# Altium PCB irf540触发V2.0.PcbDoc
Units mil, origin at the board's own origin, x right, y up, seen from the top; angles counter-clockwise.
Board outline 2532.19 x 1921.12 mil, 2 copper layers (Top Layer, Bottom Layer); 28 components, 16 nets, 70 pads, 0 vias.
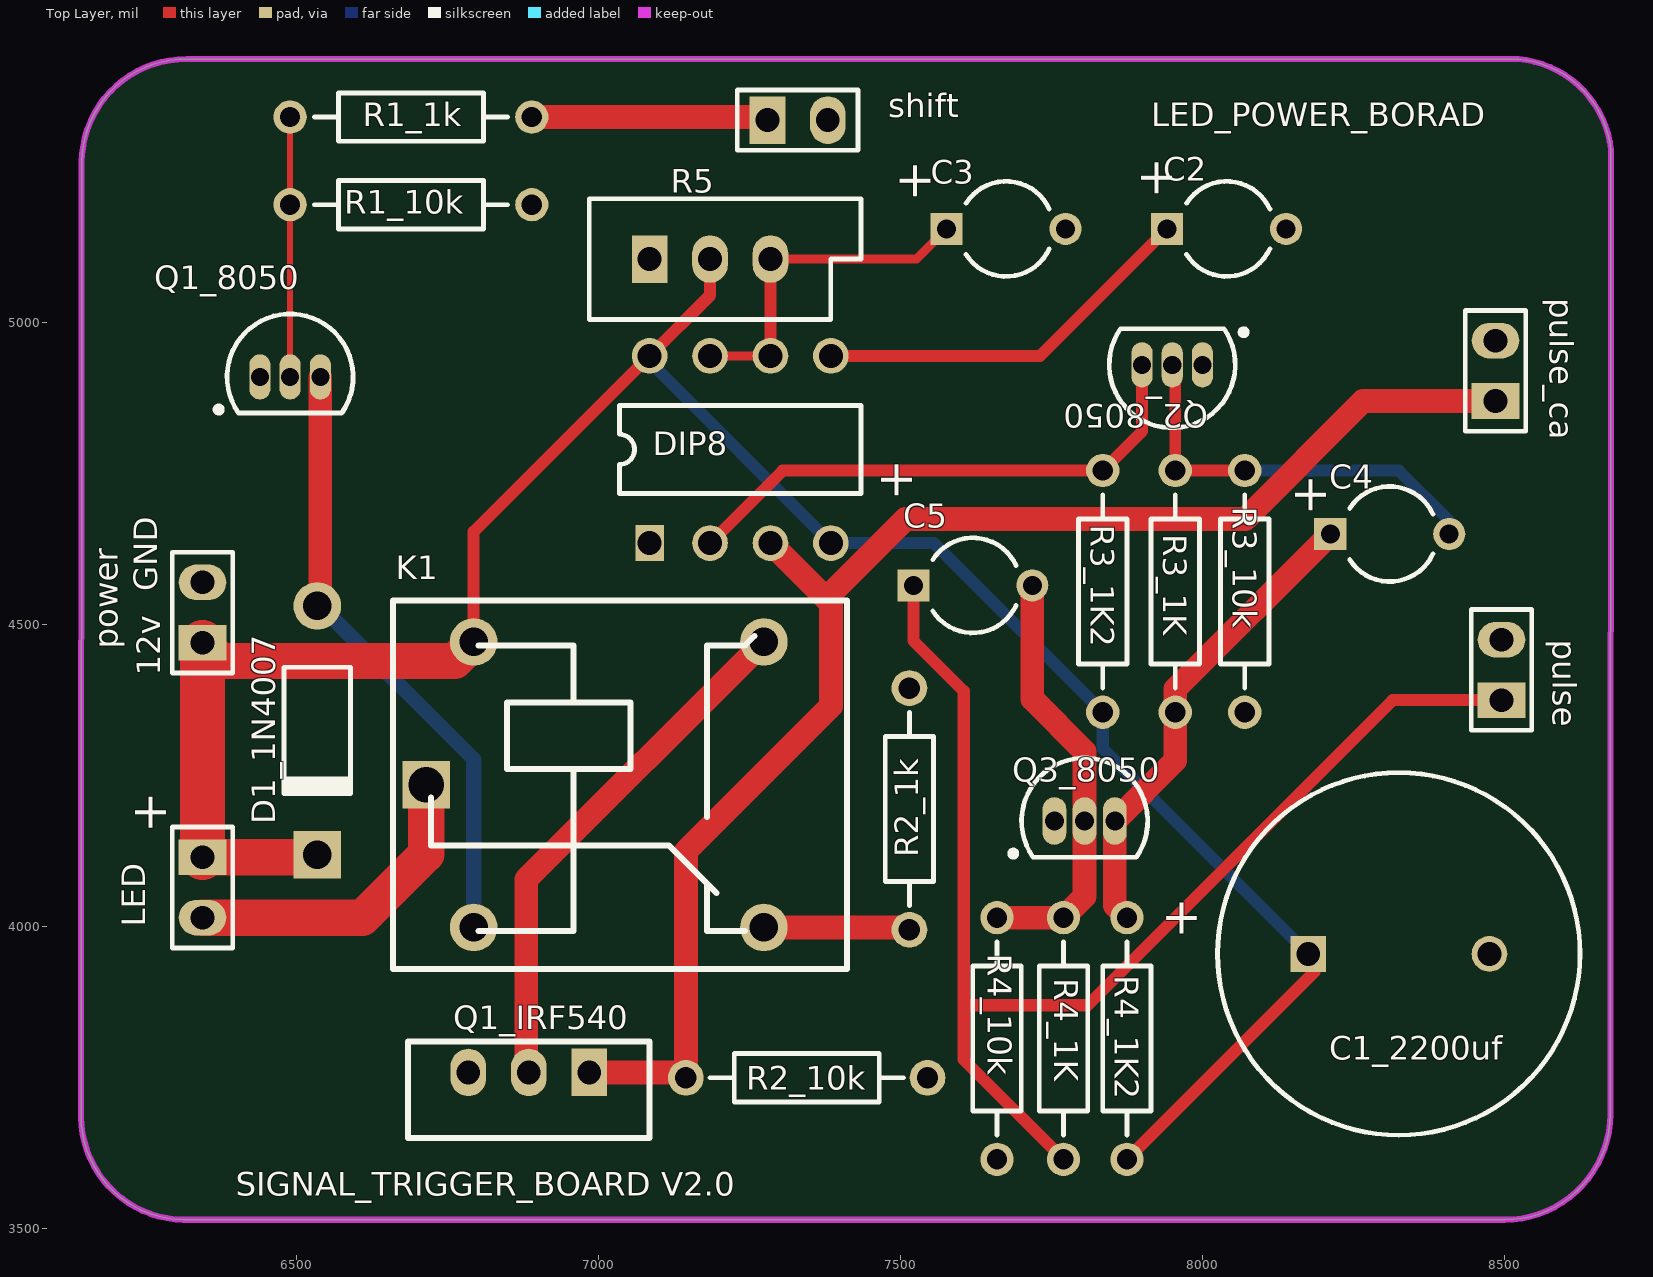
[diagram p0: Top Layer view]
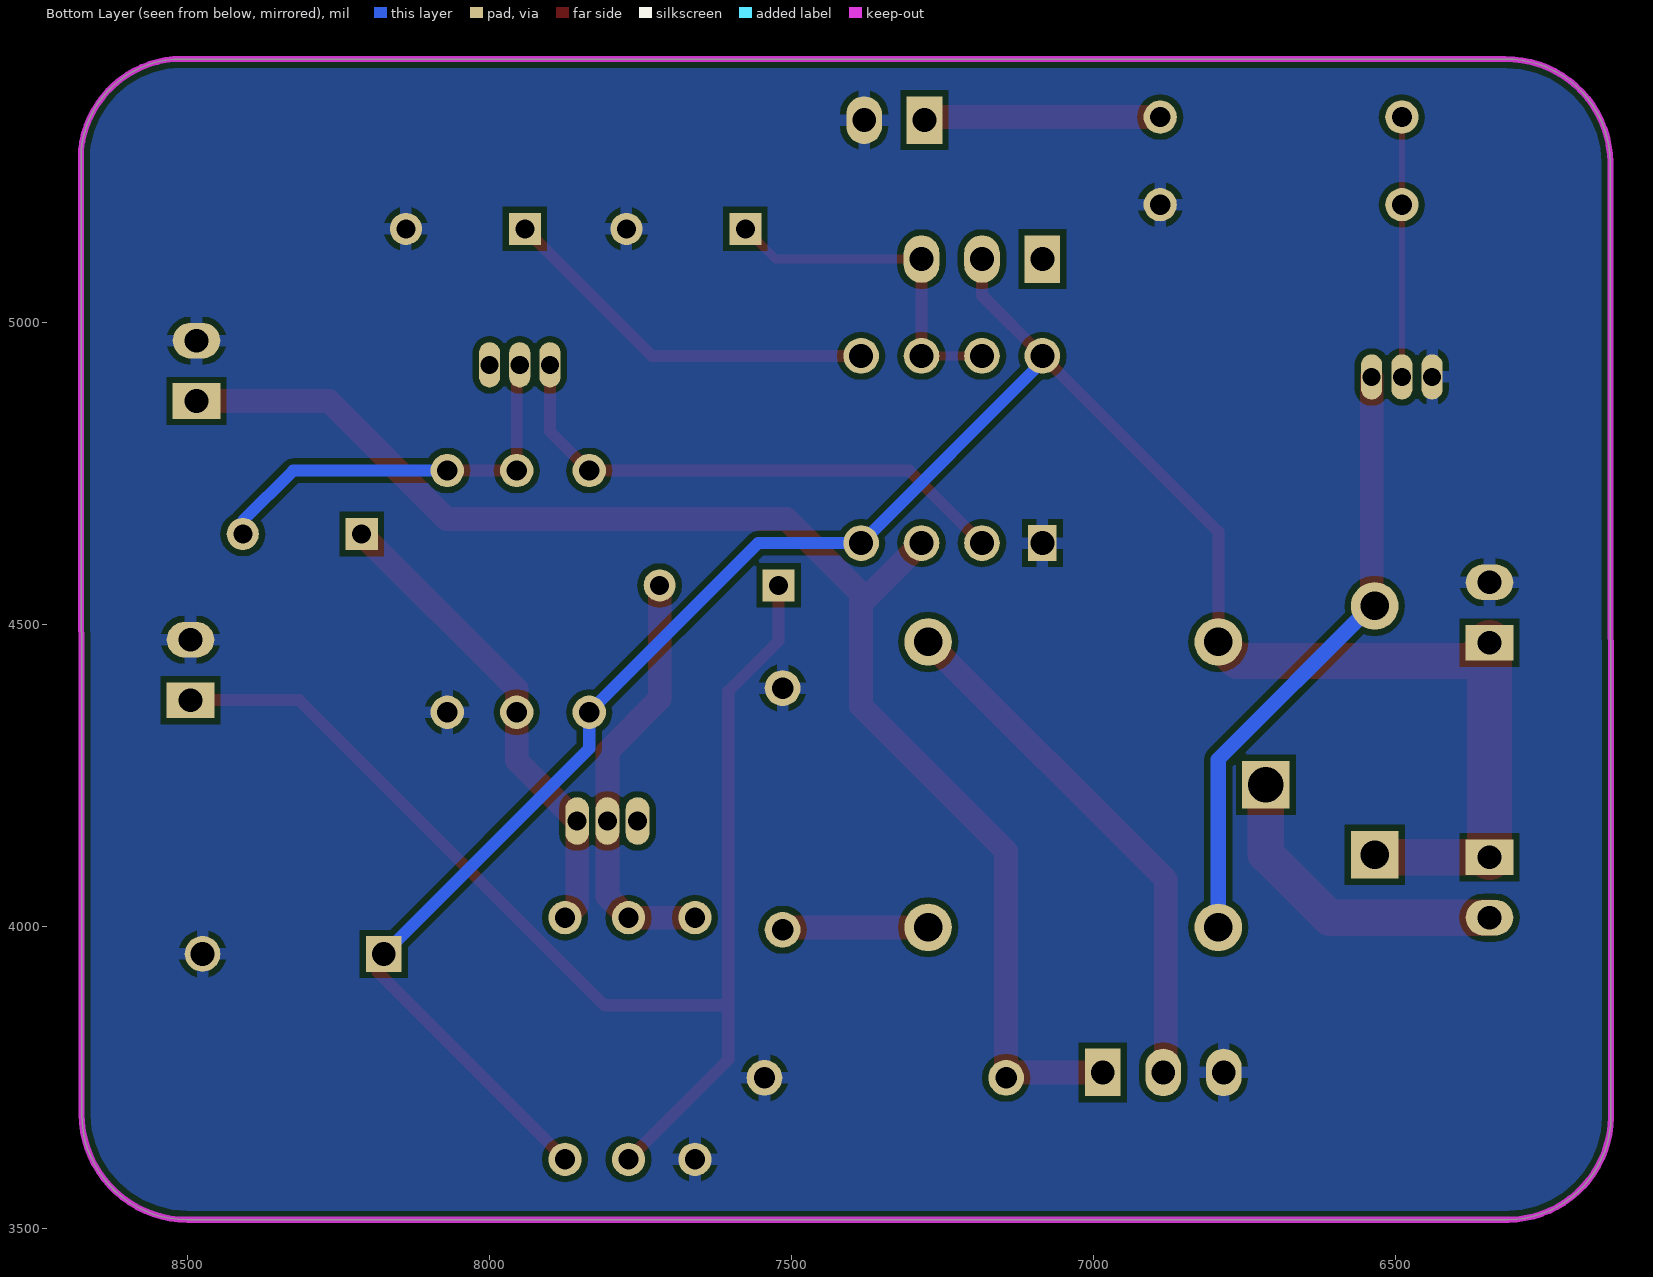
[diagram p1: Bottom Layer view, seen from below]

## Layer stack, top to bottom
Top Layer: signal copper 1.4
Dielectric: dielectric 12.6, FR-4, Dk 4.8
Bottom Layer: signal copper 1.4

## Board outline
6143.95,3685 ccw(c6316.21,3687.26) 6313.95,3515 8500,3515 ccw(c8500,3690) 8675,3690 8676.14,5286.26 ccw(c8508.41,5268.04) 8522.94,5436.12 6319.07,5436.12 ccw(c6317.64,5263.56) 6145.07,5265

## Design rules (kind name [scope] priority, off if disabled: settings)
Clearance [All] p1: gap=10
PlaneConnect [All] p1: planeconnectstyle=Relief reliefexpansion=20 reliefentries=4 reliefconductorwidth=20 reliefairgap=10
PolygonConnect [All] p1: connectstyle=Relief reliefconductorwidth=20 reliefentries=4 polygonreliefangle="90 Angle" airgapwidth=10
RoutingVias [All] p1: holewidth=28 width=50 viastyle="Through Hole" minholewidth=28 minwidth=50 maxholewidth=28 maxwidth=50
SolderMaskExpansion [All] p1: expansion=4
Width [All] p1: maxlimit=78.74 minlimit=10 preferedwidth=10
27 further rules are at their usual default settings.

## Components (designator, comment, footprint, x,y, rotation, side; value= is the part's Value field where it differs from the comment)
C1_2200uf "Cap" RB7.6-15 8325,3955 r180 top
C2 "Cap2" CAPR5-4X5 8040,5155 r0 top
C3 "Cap2" CAPR5-4X5 7675,5155 r0 top
C4 "Cap2" CAPR5-4X5 8310,4650 r0 top
C5 "Cap2" CAPR5-4X5 7620,4565 r0 top
D1_1N4007 "Diode 1N4007" DO-41 6535,4325 r270 top
DIP8 "NE555" DIP8 7085,4635 r90 top
K1 "Relay-SPDT" RELAY_SDR 6660,3930 r0 top
LED "Header 2" HDR1X2 6345,4115 r270 top
power "Header 2" HDR1X2 6345,4470 r90 top
pulse "Header 2" HDR1X2 8495,4375 r90 top (schematic designator PULSE)
pulse_ca "Header 2" HDR1X2 8485,4870 r90 top
Q1_8050 "NPN" TO-226-AA#1 6490,4910 r270 top
Q1_IRF540 "MOSFET-N" PCBComponent_1 7085,3810 r180 top
Q2_8050 "NPN" TO-226-AA#1 7950,4930 r90 top
Q3_8050 "NPN" TO-226-AA#2 7805,4175 r270 top
R1_1k "Res2" AXIAL-0.4#1 6690,5340 r180 top
R1_10k "Res2" AXIAL-0.4#1 6690,5195 r180 top
R2_1k "Res2" AXIAL-0.4#2 7515,4195 r90 top (schematic designator R2)
R2_10k "Res2" AXIAL-0.4#2 7345,3750 r180 top
R3_1K "Res2" AXIAL-0.4#1 7955,4555 r270 top
R3_1K2 "Res2" AXIAL-0.4#1 7835,4555 r90 top
R3_10k "Res2" AXIAL-0.4#1 8070,4555 r90 top
R4_1K "Res2" AXIAL-0.4#1 7770,3815 r270 top
R4_1K2 "Res2" AXIAL-0.4#1 7875,3815 r90 top
R4_10k "Res2" AXIAL-0.4#1 7660,3815 r90 top
R5 "Res Tap" VR5 7185,5105 r0 top
shift "Header 2" HDR1X2 7280,5335 r0 top

## Footprints (in the part's own frame and the unit in brackets; to place one, negate y for a bottom-side part, rotate by r counter-clockwise, add the part's x,y. Pads: shape width x height; smd on the part's side, far side on the other; paste and mask are expansions set on the pad)
AXIAL-0.4#1 [mm] "Axial Device, Thru-Hole; 2 Leads; 0.4 in Pin Spacing"
  round 1.4 hole 0.85: 1(-5.08,0) 2(5.08,0)
  silkscreen extent -4.06,-1.02 4.06,1.02
AXIAL-0.4#2 [mm] "Axial Device, Thru-Hole; 2 Leads; 0.4 in Pin Spacing"
  round 1.5 hole 0.9: 1(-5.08,0) 2(5.08,0)
  silkscreen extent -4.06,-1.02 4.06,1.02
CAPR5-4X5 [mm] "Capacitor; 2 Leads"
  rect 1.35x1.35 hole 0.8: 1(-2.5,0)
  round 1.35 hole 0.8: 2(2.5,0)
  silkscreen extent -1.69,-2 1.82,2
DIP8 [mm]
  rect 1.5x1.2 hole 1: 1(0,0)
  round 1.5 hole 1: 2(0,-2.54) 3(0,-5.08) 4(0,-7.62) 5(7.87,-7.62) 6(7.87,-5.08) 7(7.87,-2.54) 8(7.87,0)
  silkscreen extent 2.08,-8.89 5.79,1.27
DO-41 [mm] "Diode, Axial; Body 5.2 x 2.7 mm (LxDia. max), Lead Dia. 0.86 mm (max)"
  round 2 hole 1.2: 1(-5.23,0)
  rect 2x2 hole 1.2: 2(5.23,0)
  silkscreen extent -2.65,-1.4 2.75,1.4
HDR1X2 [mm] "Connector; Header; 2 Position"
  rect 1.5x2 hole 1: 1(0,0)
  oval 1.5x2 hole 1: 2(2.54,0)
  silkscreen extent -1.27,-1.27 3.81,1.27
PCBComponent_1 [mm]
  rect 1.5x2 hole 1: 1(2.54,1.3)
  oval 1.5x2 hole 1: 2(5.08,1.3) 3(7.62,1.3)
  silkscreen extent 0,0 10.16,4.06
RB7.6-15 [mm] "Polarized Capacitor (Radial); 2 Leads"
  rect 1.5x1.5 hole 1: 1(3.81,0)
  round 1.5 hole 1: 2(-3.81,0)
  silkscreen extent -7.62,-7.62 7.62,7.62
RELAY_SDR [mm]
  rect 2x2 hole 1.5: 1(1.4,7.75)
  round 2 hole 1.2: 2(15.6,1.75) 3(15.6,13.75) 4(3.4,13.75) 5(3.4,1.75)
  silkscreen extent 0,0 19.1,15.5
TO-226-AA#1 [mil] "TO, Flat Index; 3 In-Line, Axial Leads; Body Dia. 4.8mm; Leads 0.55 x 0.51 mm (max)"
  oval 75x35 hole 30: 1(0,-50) 2(0,0) 3(0,50)
  silkscreen extent -104,-123 60,104, body extent -105,-105 60,105, height 210
TO-226-AA#2 [mil] "TO, Flat Index; 3 In-Line, Axial Leads; Body Dia. 4.8mm; Leads 0.55 x 0.51 mm (max)"
  oval 78.74x39.37 hole 31.5: 1(0,-50) 2(0,0) 3(0,50)
  silkscreen extent -104,-123 60,104, body extent -105,-105 60,105, height 210
VR5 [mm] "Thru-Hole; 3 Leads"
  rect 1.5x2 hole 1: 1(-2.54,0)
  oval 1.5x2 hole 1: 2(0,0) 3(2.54,0)
  silkscreen extent -5.08,-2.54 6.35,2.54

## Part data
C1_2200uf: library part "Cap Pol1", "Polarized Capacitor (Radial)"
C2 C3 C4 C5: "Capacitor"
D1_1N4007: "1 Amp General Purpose Rectifier"
K1: "Single-Pole Dual-Throw Relay"
LED power pulse pulse_ca shift: "Header, 2-Pin"
Q1_8050 Q2_8050 Q3_8050: "NPN Bipolar Transistor"
Q1_IRF540: "N-Channel MOSFET"
R1_1k R1_10k R2_1k R2_10k R3_1K R3_1K2 R3_10k R4_1K R4_1K2 R4_10k: "Resistor"
R5: "Tapped Resistor"

## Nets (pads, with @x,y where several pads share a name; then routed paths per layer and width w, separated by ;. In a path a pad name is that pad's centre, name@x,y a point inside that pad or via, vN(x,y) a via of type N, cw(c..) or ccw(c..) an arc to the next point about the centre after c; other vN are vias at no path point)
12V: C1_2200uf.1 D1_1N4007.2 DIP8.4 DIP8.8 K1.4 LED.1 power.1 R3_1K2.1 R4_1K2.1 R5.2 | length 3830.3
  Top Layer w20: K1.4 6793.86,4653.7 DIP8.8 7185,5044.84 R5.2 ; R4_1K2.1 8185,3925 C1_2200uf.1@8185,3965
  Top Layer w60: LED.1 D1_1N4007.2@6530.91,4115 ; power.1 6375,4440 6762.52,4440 K1.4
  Top Layer w75: LED.1 power.1
  Bottom Layer w20: DIP8.8 7085,4935 DIP8.4 7555.28,4635 7835,4355.28 R3_1K2.1 7835,4295 C1_2200uf.1
GND: C1_2200uf.2 C2.2 C3.2 DIP8.1 power.2 pulse.2 pulse_ca.2 Q1_8050.1 Q1_IRF540.3 Q2_8050.1 Q3_8050.1 R1_10k.1 R2_1k.2 R2_10k.1 R3_10k.1 R4_10k.1 shift.2
INPUT_PUL: C5.1 pulse.1 R4_1K.2 | length 2152.1
  Top Layer w20: C5.1 7521.57,4473.43 7605,4390 7605,3870 ; R4_1K.2 7605,3780 7605,3870 ; pulse.1 8315,4375 7810,3870 7605,3870
MOS_PUL_CA: DIP8.3 pulse_ca.1 Q1_IRF540.1 R2_10k.2 | length 2437.8
  Top Layer w39.37: Q1_IRF540.1 7136.18,3758.82 R2_10k.2 7145,4125 7385,4365 7385,4551.26 7508.74,4675 8070.96,4675 8265.96,4870 pulse_ca.1 ; DIP8.3 7385,4535
NetC2_1: C2.1 DIP8.5 | length 643.6
  Top Layer w19.68: DIP8.5 7731.42,4944.84 C2.1
NetC3_1: C3.1 DIP8.6 DIP8.7 R5.3 | length 572.4
  Top Layer w15: DIP8.7 DIP8.6 ; R5.3 7526.57,5105 C3.1
  Top Layer w20: DIP8.6 R5.3
NetC4_1: C4.1 Q3_8050.3 R3_1K.2 R4_1K2.2 | length 791
  Top Layer w39.37: R4_1K2.2 7855,4035 Q3_8050.3 7955,4275 R3_1K.2 7955,4393.43 C4.1
NetC4_2: C4.2 Q2_8050.2 R3_1K.1 R3_10k.2 | length 686.6
  Top Layer w19.68: Q2_8050.2 7955,4925 R3_1K.1 R3_10k.2
  Bottom Layer w19.68: R3_10k.2 8325,4755 8408.43,4671.57 C4.2
NetC5_2: C5.2 Q3_8050.2 R4_1K.1 R4_10k.2 | length 710.4
  Top Layer w39.37: R4_10k.2 R4_1K.1 7805,4050 Q3_8050.2 7805,4290 7718.43,4376.57 C5.2
NetD1_1N4007_1: D1_1N4007.1 K1.5 Q1_8050.3 | length 1023.4
  Top Layer w39.37: D1_1N4007.1 6540,4535.91 Q1_8050.3
  Bottom Layer w25: D1_1N4007.1@6540.05,4530.91 6793.86,4277.1 K1.5
  Bottom Layer w39.37: D1_1N4007.1 D1_1N4007.1@6540.05,4530.91
NetDIP8_2: DIP8.2 Q2_8050.3 R3_1K2.2 | length 901.6
  Top Layer w19.68: DIP8.2 7305,4755 R3_1K2.2 7900,4820 Q2_8050.3
NetK1_1: K1.1 LED.2 | length 528.7
  Top Layer w60: LED.2 6610,4015 6715.12,4120.12 K1.1
NetK1_2: K1.2 R2_1k.1 | length 236.9
  Top Layer w39.37: K1.2 R2_1k.1@7511.1,3998.9
NetK1_3: K1.3 Q1_IRF540.2 | length 877.2
  Top Layer w39.37: Q1_IRF540.2 6880.79,3763.03 6880.79,4077.95 K1.3
NetQ1_8050_2: Q1_8050.2 R1_1k.2 R1_10k.2 | length 430
  Top Layer w10: Q1_8050.2 R1_10k.2 R1_1k.2
NetR1_1k_1: R1_1k.1 shift.1 | length 392.1
  Top Layer w39.37: R1_1k.1 7275,5340 shift.1
pads on no net: R5.1

## Polygon pours and split planes (outlines as drawn)
GND on Bottom Layer "Top Layer-No Net" (solid, remove dead copper, pour order 3): 6075,5515 8870,5515 8890,5495 8830,5435 8830,3205 6180,3205 6045,3340 6075,3370 6075,5515

## Keep-outs
Keep-Out Layer:
  the board outline again, w10

## Silkscreen, mask and mechanical layers (free items; w line width, h text height)
Top Overlay:
  text "LED_POWER_BORAD" at 7915,5325 h39.37
  text "+" at 7950,5205 h60 r90
  text "+" at 7550,5200 h60 r90
  text "+" at 7520,4705 h60 r90
  text "+" at 8205,4680 h60 r90
  text "GND" at 6270,4555 h39.37 r90
  text "12v" at 6275,4415 h39.37 r90
  text "+" at 6285,4155 h60 r90
  text "SIGNAL_TRIGGER_BOARD V2.0" at 6400,3555 h39.37

## Text inside footprints (layer, text, board x,y; h text height)
C1_2200uf: Top Overlay "+" at 8000,4040 h59.06 r180